# EAGLE board CD-Ripper (EAGLE 6.2)
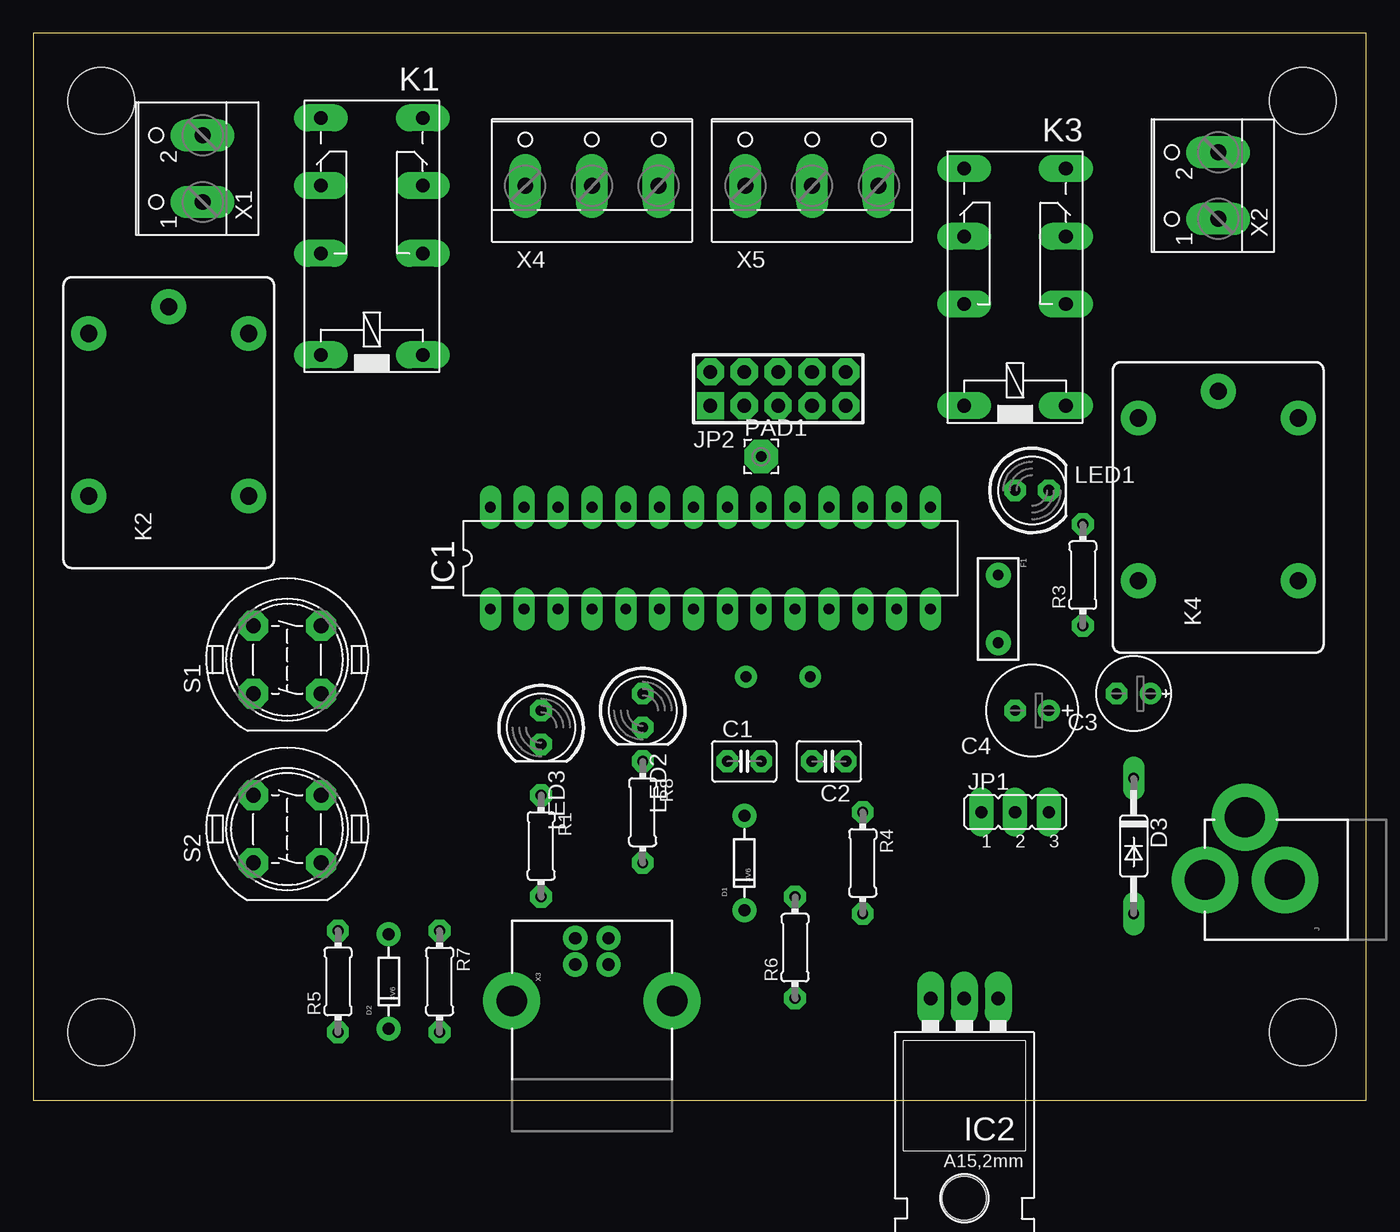
[diagram p0: board, top side]
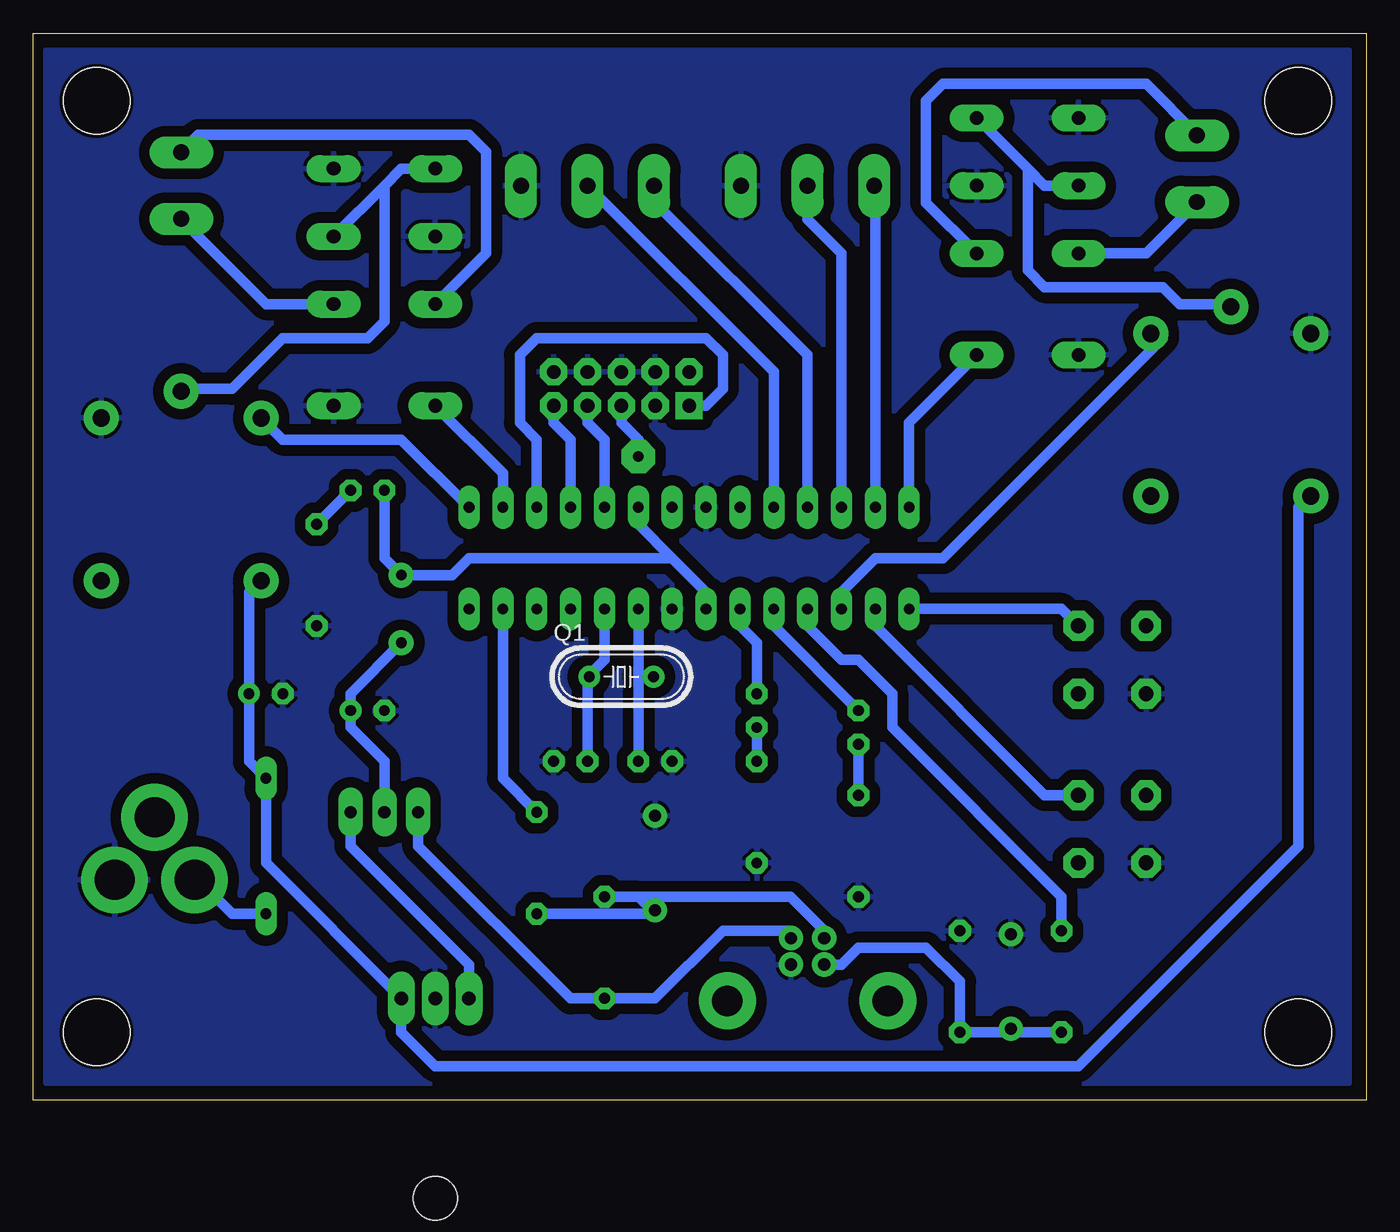
[diagram p1: board, bottom side, seen from below]

Size 100 x 80 mm. Coordinates in mm from the lower left corner, seen from the top.
Outline: 0,0 100,0 100,80 0,80 0,0
Copper layers (1*16): Top 0.035mm / dielectric 1.5mm / Bottom 0.035mm
Design rules: minimum track width 0.8mm, minimum drill 0.8mm, track to track 0.8mm, track to pad 0.8mm, pad to pad 0.45mm, via to via 0.8mm, smd to smd 8mil, copper to edge 10mil, drill to drill 8mil, minimum pad ring 0.1mm, minimum via ring 0.6mm, stop-mask expansion 0mil, vias tented up to drill 0mil, thermal gap 10mil
Holes 5 mm at 5.08,74.93 95.25,74.93 95.25,5.08 5.08,5.08

## Footprints (pad centres in the part's own frame; a part is rotated, then mirrored left to right if it is on the bottom)
C2.5-3 = drill 0.813 pad 1.6 octagon: 1 -1.27,0; 2 1.27,0
E2,5-6E = drill 0.813 pad 1.575: + -1.27,0 | drill 0.813 pad 1.575 octagon: - 1.27,0
E2,5-7 = drill 0.813 pad 1.6: + -1.27,0 | drill 0.813 pad 1.6 octagon: - 1.27,0
DIODE-ZENER = drill 0.9: P$1 -3.556,0; P$2 3.556,0
DO35-10 = drill 0.813 long: A 5.08,0; C -5.08,0
PTC = drill 0.8 pad 1.88: P$1 -2.54,0; P$2 2.54,0
DIL28-3 = drill 0.813 long: 1 -16.51,-3.81; 2 -13.97,-3.81; 3 -11.43,-3.81; 4 -8.89,-3.81; 5 -6.35,-3.81; 6 -3.81,-3.81; 7 -1.27,-3.81; 8 1.27,-3.81; 9 3.81,-3.81; 10 6.35,-3.81; 11 8.89,-3.81; 12 11.43,-3.81; 13 13.97,-3.81; 14 16.51,-3.81; 15 16.51,3.81; 16 13.97,3.81; 17 11.43,3.81; 18 8.89,3.81; 19 6.35,3.81; 20 3.81,3.81; 21 1.27,3.81; 22 -1.27,3.81; 23 -3.81,3.81; 24 -6.35,3.81; 25 -8.89,3.81; 26 -11.43,3.81; 27 -13.97,3.81; 28 -16.51,3.81
78XXL = drill 1.016 long: GND 0,-3.81; IN -2.54,-3.81; OUT 2.54,-3.81 | hole 3.302: 0,11.176
POWER_JACK_PTH = drill 2.997 pad 4.318: GND 0,7.7; GNDBREAK 4.7,10.7; PWR 0,13.7
JP2 = drill 0.914 long: 1 -2.54,0; 2 0,0; 3 2.54,0
AVR-ISP-10 = drill 1.016 square: 1 -5.08,-1.27 | drill 1.016 octagon: 2 -5.08,1.27; 3 -2.54,-1.27; 4 -2.54,1.27; 5 0,-1.27; 6 0,1.27; 7 2.54,-1.27; 8 2.54,1.27; 9 5.08,-1.27; 10 5.08,1.27
351 = drill 1.016 long: 1 -3.81,-3.81; 16 -3.81,3.81; O1 8.89,-3.81; O2 8.89,3.81; P1 3.81,-3.81; P2 3.81,3.81; S1 13.97,-3.81; S2 13.97,3.81
JS-M = drill 1.3: 1 6.7,6; 2 6.7,-6; C 8.7,0; NC -5.5,-6; NO -5.5,6
LED5MM = drill 0.813 octagon: A -1.27,0; K 1.27,0
2,54/0,8 = drill 0.813 pad 2.54 octagon: 1 0,0
HC49/S = drill 0.813: 1 -2.413,0; 2 2.413,0
0204/7 = drill 0.813 octagon: 1 -3.81,0; 2 3.81,0
DT6 = drill 1.118 octagon: 1 -2.54,2.54; 2 2.54,2.54; 3 2.54,-2.54; 4 -2.54,-2.54
W237-102 = drill 1.194 long: 1 -2.5,-1.27; 2 2.5,-1.27
USB-B-PTH = drill 0.914 pad 1.676: D+ 0,1.25; D- 1.981,1.25; GND 0,-1.25; VBUS 1.981,-1.25 | drill 2.286: S1 -2.718,-6.02; S2 -2.718,6.02
W237-103 = drill 1.194 long: 1 -5,-1.29; 2 0,-1.29; 3 5,-1.29

## Placement (x,y rotation side)
C1  22pF  [C2.5-3]  53.34,25.4 0 top
C2  22pF  [C2.5-3]  59.69,25.4 180 top
C3  100µ  [E2,5-6E]  82.55,30.48 180 top
C4  10µ  [E2,5-7]  74.93,29.21 180 top
D1  3V6  [DIODE-ZENER]  53.34,17.78 90 top
D2  3V6  [DIODE-ZENER]  26.67,8.89 90 top
D3  [DO35-10]  82.55,19.05 270 top
F1  500mA  [PTC]  72.39,36.83 270 top
IC1  MEGA48/88/168-PU  [DIL28-3]  50.8,40.64 0 top
IC2  5V  [78XXL]  69.85,3.81 180 top
J  POWER_JACKPTH  [POWER_JACK_PTH]  101.6,16.51 90 top
JP1  POWER  [JP2]  73.66,21.59 0 top
JP2  AVR-ISP-10  [AVR-ISP-10]  55.88,53.34 0 top
K1  351  [351]  25.4,59.69 90 top
K2  JS-M1-12V-5  [JS-M]  10.16,50.8 90 top
K3  351  [351]  73.66,55.88 90 top
K4  JS-M1-12V-5  [JS-M]  88.9,44.45 90 top
LED1  red - 2V  [LED5MM]  74.93,45.72 0 top
LED2  [LED5MM]  45.72,29.21 270 top
LED3  [LED5MM]  38.1,27.94 270 top
PAD1  WIREPAD2,54/0,8  [2,54/0,8]  54.61,48.26 0 top
Q1  20MHz  [HC49/S]  55.88,31.75 0 bottom
R1  [0204/7]  38.1,19.05 270 top
R3  330  [0204/7]  78.74,39.37 90 top
R4  68  [0204/7]  62.23,17.78 270 top
R5  68  [0204/7]  22.86,8.89 90 top
R6  1k5  [0204/7]  57.15,11.43 90 top
R7  1M  [0204/7]  30.48,8.89 270 top
R8  [0204/7]  45.72,21.59 270 top
S1  DT6  [DT6]  19.05,33.02 90 top
S2  DT6  [DT6]  19.05,20.32 90 top
X1  MOTOR1  [W237-102]  11.43,69.85 90 top
X2  MOTOR2  [W237-102]  87.63,68.58 90 top
X3  USBPTH  [USB-B-PTH]  41.91,10.16 90 top
X4  STATUS1  [W237-103]  41.91,69.85 0 top
X5  STATUS2  [W237-103]  58.42,69.85 0 top

## Library data of the parts
C1 C2 = capacitor-wima
C3 C4 R1 R3-R8 = resistor
D1 D2 F1 IC2 J X3 = SparkFun
D3 = diode
IC1 JP2 = avr-7
JP1 = jumper
K1 K3 = relay; OC_FARNELL: unknown; OC_NEWARK: unknown
K2 K4 = relay; MF: FARNELL; MPN: JSM1-12V-5; OC_FARNELL: 910351; OC_NEWARK: 14J1764
LED1-LED3 = led
PAD1 = wirepad
Q1 = crystal; OC_FARNELL: 1667008; OC_NEWARK: unknown
S1 S2 = switch-misc
X1 X2 = con-wago-500; MPN: 237-102; OC_FARNELL: unknown; OC_NEWARK: 70K9898
X4 X5 = con-wago-500; MPN: 237-103; OC_FARNELL: unknown; OC_NEWARK: 18M7116

## Nets
+12V: C3.+ D3.C IC2.IN K2.NO K4.NO
D+: D2.P$1 R5.1 R7.2 X3.D+
D-: D1.P$1 R4.2 R6.2 X3.D-
GND: C1.1 C2.1 C3.- C4.- D1.P$2 D2.P$2 IC1.8 IC1.22 IC2.GND J.GND JP2.3 JP2.4 JP2.6 JP2.8 JP2.10 K1.16 K1.O1 K1.S2 K2.1 K3.1 K3.O2 K3.S1 K4.2 R1.2 R3.1 R7.1 R8.2 S1.1 S2.1 X3.GND X4.3 X5.3
MISO: IC1.18 JP2.9
MOSI: IC1.17 JP2.1
N$1: LED1.K R3.2
N$2: D3.A J.PWR
N$3: K1.P2 X1.1
N$4: K1.P1 X1.2
N$5: K3.P1 X2.1
N$6: K3.P2 X2.2
N$7: IC1.5 LED3.A
N$8: IC1.6 LED2.A
N$9: LED3.K R1.1
N$10: JP2.5 PAD1.1
N$12: K1.O2 K1.S1 K2.C
N$13: K3.O1 K3.S2 K4.C
N$14: LED2.K R8.1
PB1: IC1.15 K4.1
PB2: IC1.16 K3.16
PC1: IC1.24 X5.2
PC2: IC1.25 X5.1
PC3: IC1.26 X4.2
PC4: IC1.27 X4.1
PC5: IC1.28 K1.1
PD0: IC1.2 S2.3
PD1: IC1.3 K2.2
PD2: IC1.4 R5.2
PD7: IC1.13 R4.1
RST: IC1.1 S1.3
SCK: IC1.19 JP2.7
VBUS: JP1.1 R6.1 X3.VBUS
VCC: F1.P$1 IC1.7 IC1.20 LED1.A
VREG: IC2.OUT JP1.3
VSEL: C4.+ F1.P$2 JP1.2
XTAL1: C1.2 IC1.9 Q1.2
XTAL2: C2.2 IC1.10 Q1.1

## Tracks (layer width: path | path; a pad name or v marks a point on that pad's centre or on a via)
+12V
  Bottom 0.8: K4.NO 83.82,38.1 C3.+ 83.82,25.4 D3.C 82.55,17.78 IC2.IN 72.39,5.08 69.85,2.54 21.59,2.54 5.08,19.05 5.08,44.45 K2.NO
D+
  Bottom 0.8: 26.67,5.08 R5.1 | 26.67,5.08 R7.2 30.48,8.89 33.02,11.43 38.1,11.43 39.37,10.16 X3.D+ | 26.67,5.08 D2.P$1
D-
  Bottom 0.8: 54.61,15.24 R6.2 | 53.34,13.97 54.61,15.24 | 53.34,13.97 R4.2 | 53.34,13.97 D1.P$1 | 54.61,15.24 43.18,15.24 40.64,12.7 X3.D-
GND
  Bottom 0.8: JP2.8 58.37,54.66 | JP2.6 55.93,54.56
  pour Bottom: 1.27,78.74 1.27,1.27 99.06,1.27 99.06,78.74
MISO
  Bottom 0.8: IC1.18 59.69,49.53 60.96,50.8 JP2.9
MOSI
  Bottom 0.8: IC1.17 62.23,49.53 63.5,50.8 63.5,55.88 62.23,57.15 49.53,57.15 48.26,55.88 48.26,53.34 49.53,52.07 JP2.1
N$1
  Bottom 0.8: LED1.K R3.2
N$2
  Bottom 0.8: D3.A 85.09,13.97 87.63,16.51 J.PWR
N$3
  Bottom 0.8: K1.P2 16.51,63.5 12.7,67.31 X1.1
N$4
  Bottom 0.8: K1.P1 33.02,67.31 33.02,74.93 31.75,76.2 16.51,76.2 12.7,72.39 X1.2
N$5
  Bottom 0.8: K3.P1 82.55,59.69 88.9,66.04 X2.1
N$6
  Bottom 0.8: K3.P2 66.04,63.5 66.04,71.12 67.31,72.39 87.63,72.39 88.9,71.12 X2.2
N$7
  Bottom 0.8: LED3.A 44.45,35.56 IC1.5
N$8
  Bottom 0.8: LED2.A 45.72,34.29 46.99,35.56 IC1.6
N$9
  Bottom 0.8: LED3.K R1.1
N$10
  Bottom 0.8: JP2.5 55.88,50.8 54.61,49.53 PAD1.1
N$12
  Bottom 0.8: K1.O2 24.13,68.58 25.4,69.85 | K1.S1 25.4,69.85 | 25.4,69.85 25.4,62.23 24.13,60.96 15.24,60.96 13.97,59.69 10.16,59.69 K2.C
N$13
  Bottom 0.8: K3.S2 72.39,69.85 73.66,68.58 | K3.O1 73.66,68.58 | 73.66,68.58 73.66,58.42 74.93,57.15 81.28,57.15 85.09,53.34 88.9,53.34 K4.C
N$14
  Bottom 0.8: LED2.K R8.1
PB1
  Bottom 0.8: IC1.15 72.39,49.53 81.28,49.53 K4.1
PB2
  Bottom 0.8: IC1.16 64.77,46.99 K3.16
PC1
  Bottom 0.8: IC1.24 44.45,54.61 58.42,68.58 X5.2
PC2
  Bottom 0.8: IC1.25 41.91,55.88 53.34,67.31 X5.1
PC3
  Bottom 0.8: IC1.26 39.37,63.5 41.91,66.04 X4.2
PC4
  Bottom 0.8: IC1.27 36.83,67.31 X4.1
PC5
  Bottom 0.8: IC1.28 34.29,50.8 K1.1
PD0
  Bottom 0.8: IC1.2 36.83,35.56 24.13,22.86 S2.3
PD1
  Bottom 0.8: IC1.3 39.37,38.1 36.83,40.64 31.75,40.64 15.24,57.15 K2.2
PD2
  Bottom 0.8: R5.2 22.86,15.24 35.56,27.94 35.56,30.48 38.1,33.02 39.37,33.02 41.91,35.56 IC1.4
PD7
  Bottom 0.8: R4.1 64.77,24.13 IC1.13
RST
  Bottom 0.8: IC1.1 22.86,36.83 S1.3
SCK
  Bottom 0.8: IC1.19 57.15,49.53 58.42,50.8 JP2.7
VBUS
  Bottom 0.8: X3.VBUS 43.18,12.7 48.26,12.7 53.34,7.62 R6.1 59.69,7.62 71.12,19.05 JP1.1
VCC
  Bottom 0.8: LED1.A 73.66,40.64 F1.P$1 68.58,39.37 67.31,40.64 52.07,40.64 | IC1.7 49.53,38.1 52.07,40.64 | 52.07,40.64 54.61,43.18 IC1.20
VREG
  Bottom 0.8: JP1.3 76.2,19.05 67.31,10.16 IC2.OUT
VSEL
  Bottom 0.8: F1.P$2 76.2,30.48 C4.+ 76.2,27.94 73.66,25.4 JP1.2
XTAL1
  Bottom 0.8: IC1.9 54.61,31.75 | 54.61,31.75 C1.2 | 54.61,31.75 Q1.2 53.34,31.75
XTAL2
  Bottom 0.8: 58.42,31.75 C2.2 | IC1.10 57.15,33.02 58.42,31.75 | 58.42,31.75 Q1.1